# Altium PCB Uravu_1.PcbDoc
Units mil, origin at the board's own origin, x right, y up, seen from the top; angles counter-clockwise.
Board outline 3613.19 x 2814.96 mil, 2 copper layers (Top Layer, Bottom Layer); 12 components, 51 nets, 156 pads, 9 vias.
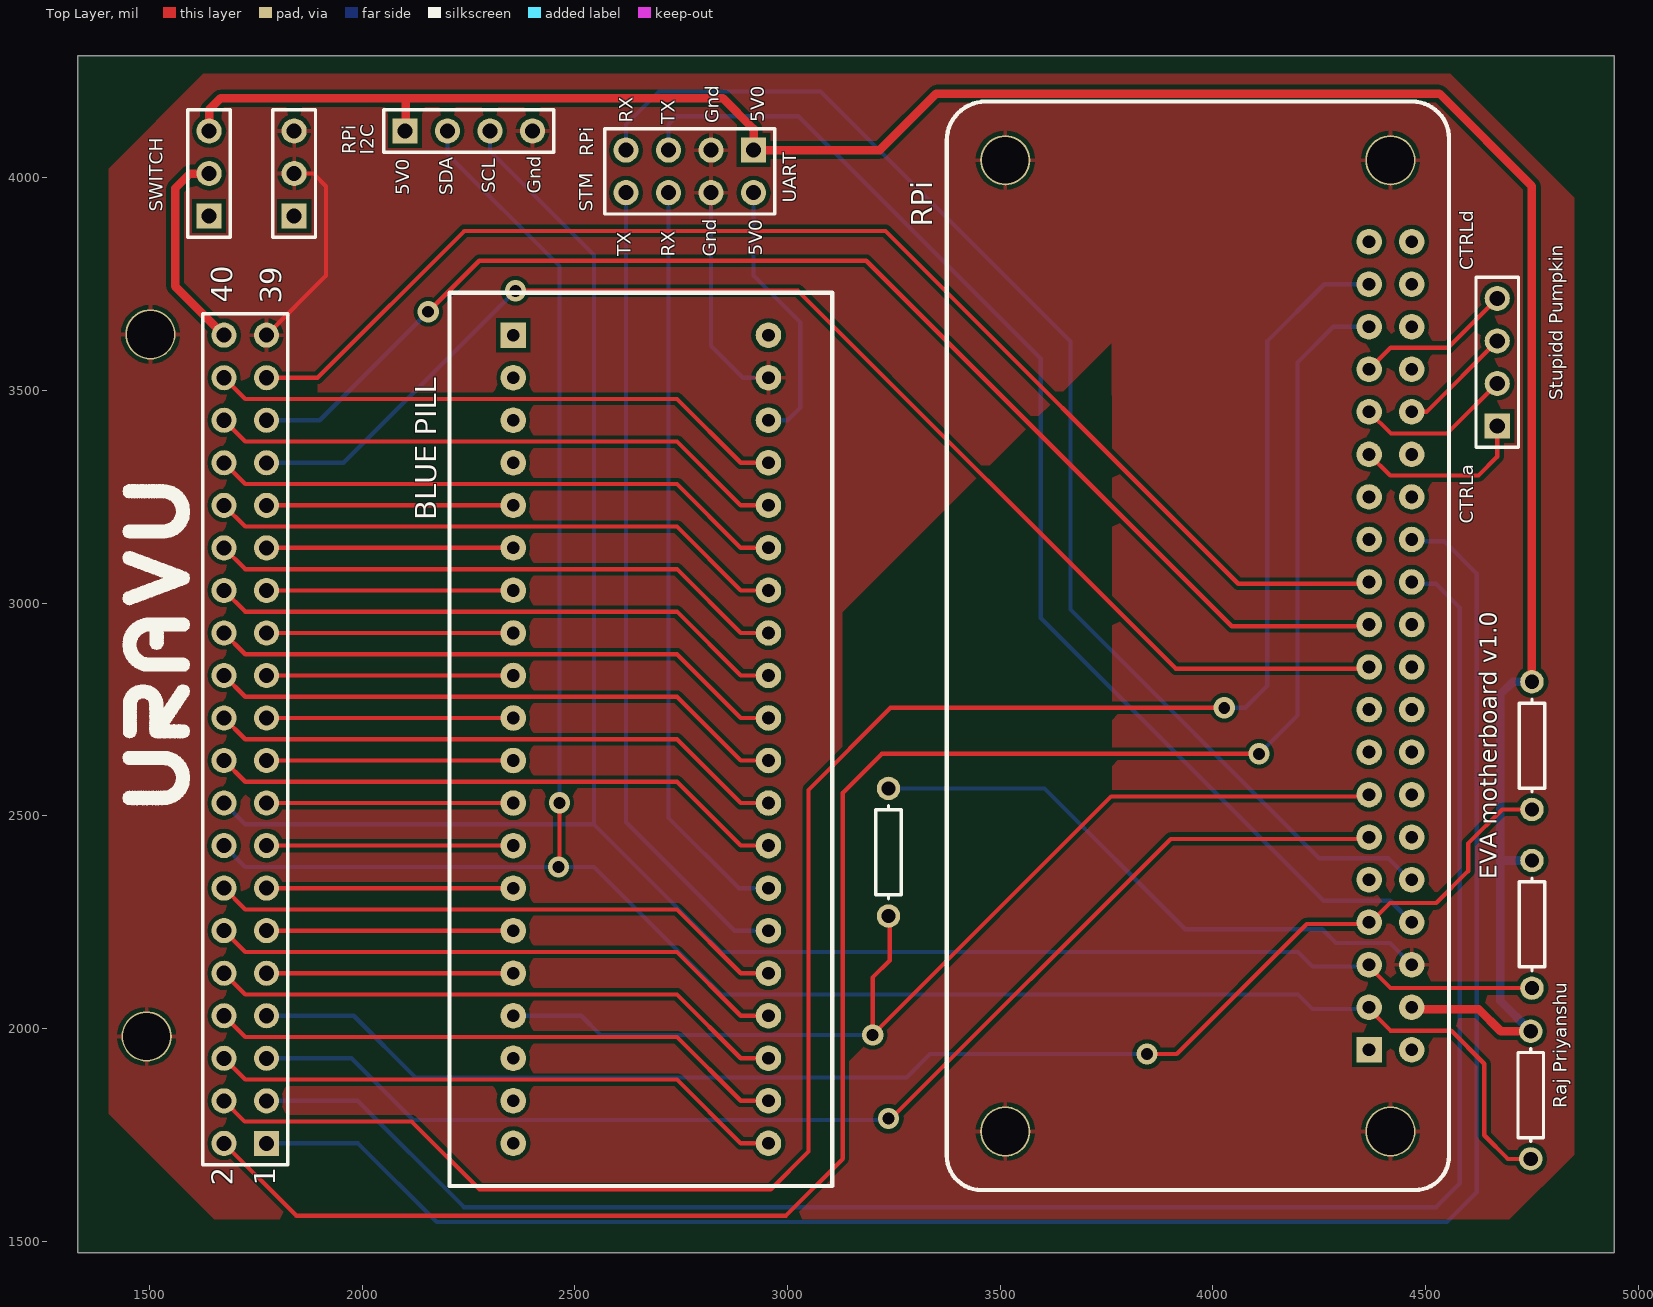
[diagram p0: Top Layer view]
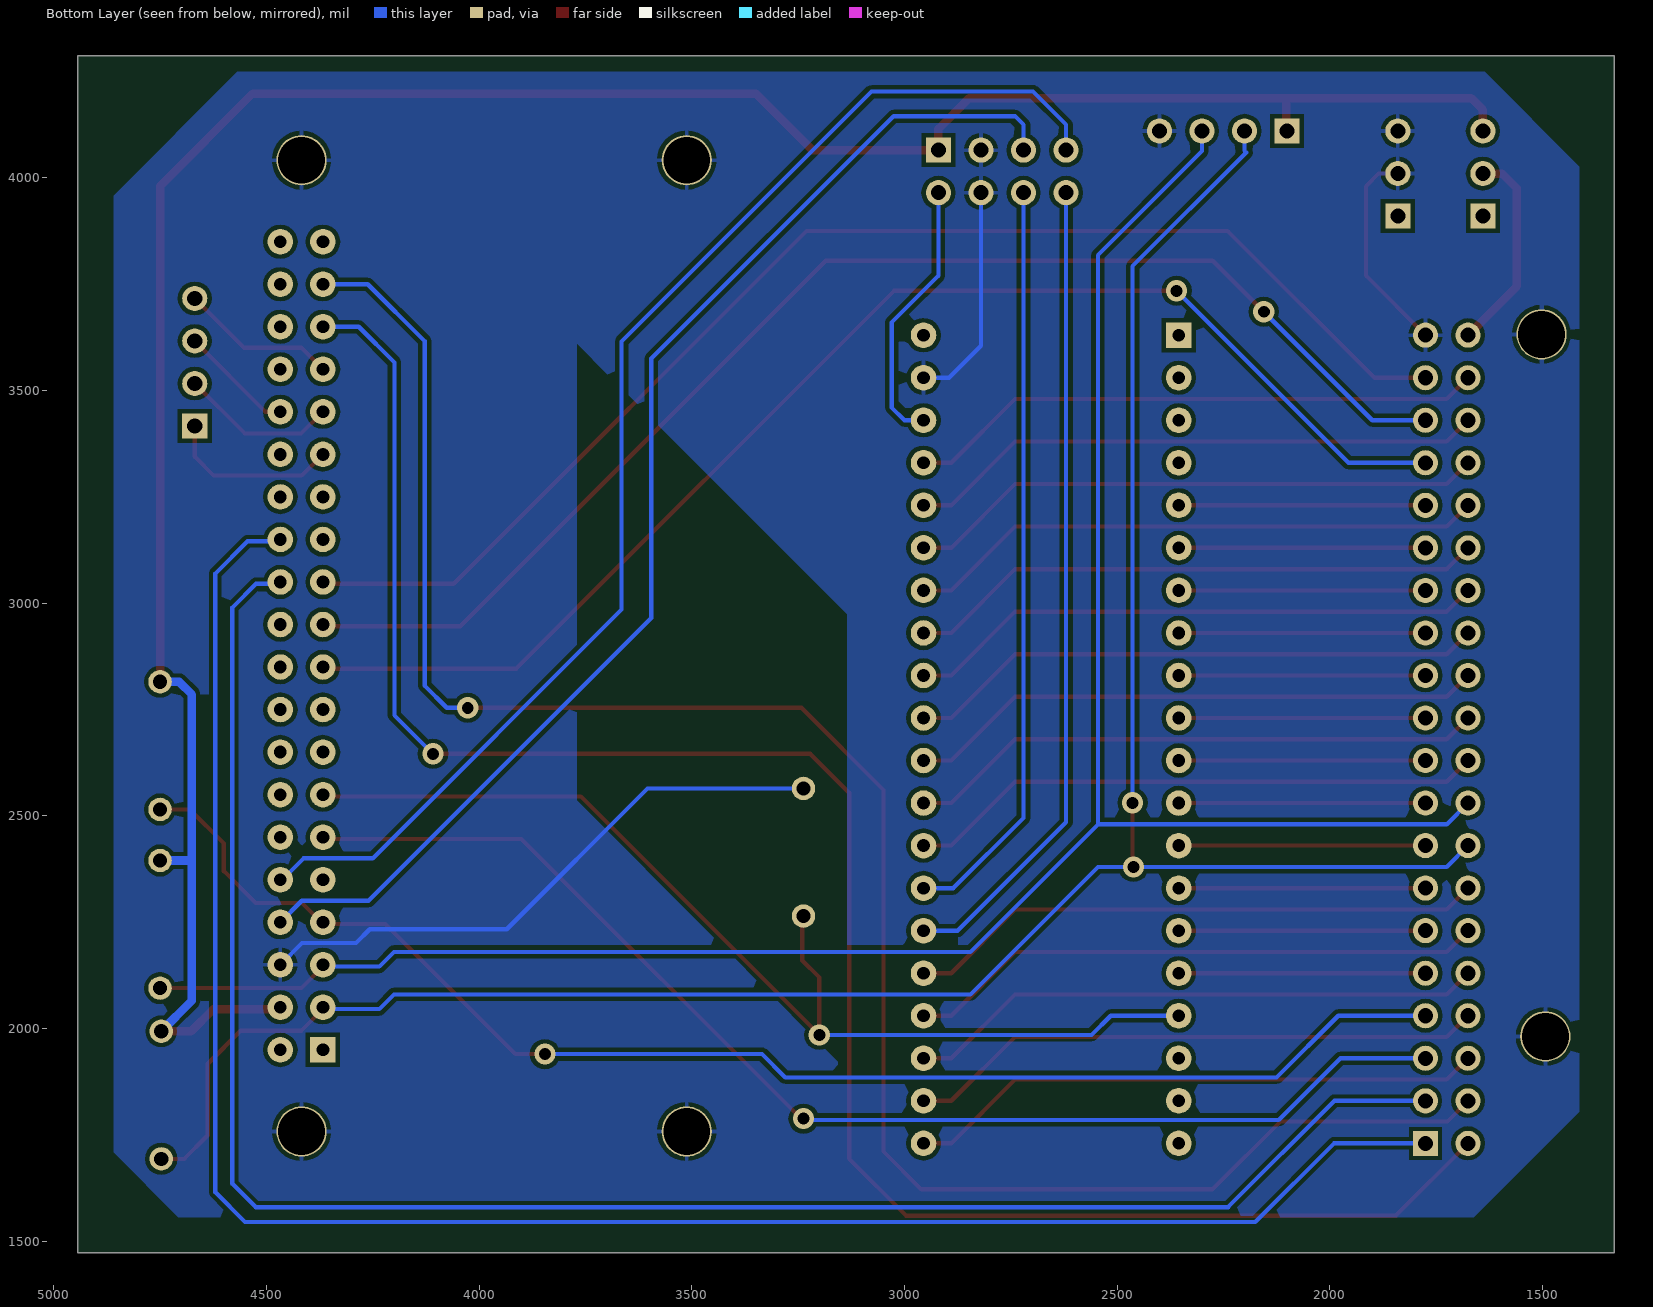
[diagram p1: Bottom Layer view, seen from below]

## Layer stack, top to bottom
Top Solder: solder mask 0.4, Solder Resist, Dk 3.5
Top Layer: signal copper 1.4
Dielectric 1: dielectric 12.6, FR-4, Dk 4.8
Bottom Layer: signal copper 1.4
Bottom Solder: solder mask 0.4, Solder Resist, Dk 3.5

## Board outline
1330.71,1472.44 4943.9,1472.44 4943.9,4287.4 1330.71,4287.4

## Design rules (kind name [scope] priority, off if disabled: settings)
Clearance [All] p1: gap=10
PolygonConnect [All] p1: connectstyle=Relief reliefconductorwidth=10 reliefentries=4 polygonreliefangle="90 Angle" airgapwidth=10
RoutingVias [All] p1: holewidth=28 width=50 viastyle="Through Hole" minholewidth=28 minwidth=50 maxholewidth=28 maxwidth=50
SolderMaskExpansion [All] p1: expansion=4
UnpouredPolygon [All] p1: allowunpoured=FALSE
Width [All] p1: maxlimit=39.37 minlimit=10 preferedwidth=10
29 further rules are at their usual default settings.

## Components (designator, comment, footprint, x,y, rotation, side; value= is the part's Value field where it differs from the comment)
P1 "Header 3" HDR1X3 1640,3910 r90 top
P2 "Header 3" HDR1X3 1840,3910 r90 top
P3 "Header 20X2" HDR2X20 1775,1730 r90 top
P4 "Header 4" HDR1X4 4668.31,3416.34 r90 top
P4 "Header 4" HDR1X4 2100.39,4110.24 r0 top
P5 "Header 4X2" HDR2X4 2920,4065 r180 top
R1 "Res1" AXIAL-0.3 4750,2665 r90 top
R2 "Res1" AXIAL-0.3 4750,2245 r90 top
R3 "Res1" AXIAL-0.3 4747.05,1843.5 r90 top
R4 "Res1" AXIAL-0.3 3237.2,2414.37 r270 top
U1 "STM32" BluePill 2205,3730 r0 top
U2 "RPi" "Raspberry Pi 0 w" 4555.12,4179.13 r180 top

## Footprints (in the part's own frame and the unit in brackets; to place one, negate y for a bottom-side part, rotate by r counter-clockwise, add the part's x,y. Pads: shape width x height; smd on the part's side, far side on the other; paste and mask are expansions set on the pad)
AXIAL-0.3 [mm] "Axial Device, Thru-Hole; 2 Leads; 0.3 in Pin Spacing"
  round 1.4 hole 0.85: 1(-3.81,0) 2(3.81,0)
  silkscreen extent -2.77,-0.76 2.77,0.76
BluePill [mil] "STM32"
  rect 60x60 hole 30: 1(150,-100)
  round 60 hole 30: 2(150,-200) 3(150,-300) 4(150,-400) 5(150,-500) 6(150,-600) 7(150,-700) 8(150,-800) 9(150,-900) 10(150,-1000) 11(150,-1100) 12(150,-1200) 13(150,-1300) 14(150,-1400) 15(150,-1500) 16(150,-1600) 17(150,-1700) 18(150,-1800) 19(150,-1900) 20(150,-2000) 21(750,-2000) 22(750,-1900) 23(750,-1800) 24(750,-1700) 25(750,-1600) 26(750,-1500) 27(750,-1400) 28(750,-1300) 29(750,-1200) 30(750,-1100) 31(750,-1000) 32(750,-900) 33(750,-800) 34(750,-700) 35(750,-600) 36(750,-500) 37(750,-400) 38(750,-300) 39(750,-200) 40(750,-100)
  silkscreen extent 0,-2100 900,0
HDR1X3 [mm] "Connector; Header; 3 Position"
  rect 1.5x1.5 hole 0.9: 1(0,0)
  round 1.5 hole 0.9: 2(2.54,0) 3(5.08,0)
  silkscreen extent -1.27,-1.27 6.35,1.27
HDR1X4 [mm] "Connector; Header; 4 Position"
  rect 1.5x1.5 hole 0.9: 1(0,0)
  round 1.5 hole 0.9: 2(2.54,0) 3(5.08,0) 4(7.62,0)
  silkscreen extent -1.27,-1.27 8.89,1.27
HDR2X4 [mm] "Connector; Header; 4x2 Position"
  rect 1.5x1.5 hole 0.9: 1(0,0)
  round 1.5 hole 0.9: 2(0,2.54) 3(2.54,0) 4(2.54,2.54) 5(5.08,0) 6(5.08,2.54) 7(7.62,0) 8(7.62,2.54)
  silkscreen extent -1.27,-1.27 8.89,3.81
HDR2X20 [mm] "Connector; Header; 20x2 Position"
  rect 1.5x1.5 hole 0.9: 1(0,0)
  round 1.5 hole 0.9: 2(0,2.54) 3(2.54,0) 4(2.54,2.54) 5(5.08,0) 6(5.08,2.54) 7(7.62,0) 8(7.62,2.54) 9(10.16,0) 10(10.16,2.54) 11(12.7,0) 12(12.7,2.54) 13(15.24,0) 14(15.24,2.54) 15(17.78,0) 16(17.78,2.54) 17(20.32,0) 18(20.32,2.54) 19(22.86,0) 20(22.86,2.54) 21(25.4,0) 22(25.4,2.54) 23(27.94,0) 24(27.94,2.54) 25(30.48,0) 26(30.48,2.54) 27(33.02,0) 28(33.02,2.54) 29(35.56,0) 30(35.56,2.54) 31(38.1,0) 32(38.1,2.54) 33(40.64,0) 34(40.64,2.54) 35(43.18,0) 36(43.18,2.54) 37(45.72,0) 38(45.72,2.54) 39(48.26,0) 40(48.26,2.54)
  silkscreen extent -1.27,-1.27 49.53,3.81
"Raspberry Pi 0 w" [mil] "RPi0w"
  rect 60x60 hole 30: 1(187.99,2229.33)
  round 60 hole 30: 2(87.99,2229.33) 3(187.99,2129.33) 4(87.99,2129.33) 5(187.99,2029.33) 6(87.99,2029.33) 7(187.99,1929.33) 8(87.99,1929.33) 9(187.99,1829.33) 10(87.99,1829.33) 11(187.99,1729.33) 12(87.99,1729.33) 13(187.99,1629.33) 14(87.99,1629.33) 15(187.99,1529.33) 16(87.99,1529.33) 17(187.99,1429.33) 18(87.99,1429.33) 19(187.99,1329.33) 20(87.99,1329.33) 21(187.99,1229.33) 22(87.99,1229.33) 23(187.99,1129.33) 24(87.99,1129.33) 25(187.99,1029.33) 26(87.99,1029.33) 27(187.99,929.33) 28(87.99,929.33) 29(187.99,829.33) 30(87.99,829.33) 31(187.99,729.33) 32(87.99,729.33) 33(187.99,629.33) 34(87.99,629.33) 35(187.99,529.33) 36(87.99,529.33) 37(187.99,429.33) 38(87.99,429.33) 39(187.99,329.33) 40(87.99,329.33)
  round 118.11 hole 110.24 mask+4: S1(137.8,137.8)
  round 118.11 hole 110.24: S2(1043.31,137.8) S3(1043.31,2421.26) S4(137.8,2421.26)
  silkscreen extent 0,0 1181,2559

## Part data
P1 P2: "Header, 3-Pin"
P3: "Header, 20-Pin, Dual row"
P4 P4: "Header, 4-Pin"
P5: "Header, 4-Pin, Dual row"
R1 R2 R3 R4: "Resistor"
U1: library part "Blue Pill", "Blue Pill: STM32f103c8"
U2: library part "Raspberry Pi 0 w", "Raspberry Pi 0 w GPIO"

## Free pads (board coordinates)
  round 118.11 hole 110.24: SHIELD(1493.11,1981.3) SHIELD(1501.97,3631.89)

## Via types
v1: diameter 50, hole 28, Top Layer to Bottom Layer, 9 vias

## Nets (pads, with @x,y where several pads share a name; then routed paths per layer and width w, separated by ;. In a path a pad name is that pad's centre, name@x,y a point inside that pad or via, vN(x,y) a via of type N, cw(c..) or ccw(c..) an arc to the next point about the centre after c; other vN are vias at no path point)
5V: P1.2 P3.40 | length 487.1
  Top Layer w20: P1.2 1595,4010 1560,3975 1560,3745 P3.40
5VA: P1.3 P4.1@2100.39,4110.24 P5.1 R1.2 R2.2 R3.2 U2.4 | length 5914.8
  Top Layer w20: P1.3 1640,4160 1667.01,4187.01 2102.36,4187.01 P4.1@2102.36,4118.11 ; 2103.35,4187.01 2847.99,4187.01 2920,4115 P5.1 3216.57,4065 3349.41,4197.83 4532.48,4197.83 4750,3980.32 R1.2 ; U2.4@4467.01,2045.67 4624.61,2045.67 4676.77,1993.5 R3.2
  Bottom Layer w20: R3.2 4675,2065.55 4675,2395 ; R2.2 4675,2395 ; R1.2 4705,2815 4675,2785 4675,2395
5VB: P5.2 U1.38 | length 638
  Bottom Layer w10: P5.2 2920,3770 3030,3660 3030,3460 3000,3430 U1.38
CE0N_RPI: P3.3 U2.24 | length 4422.4
  Bottom Layer w10: P3.3 1988.9,1830 2238.9,1580 4525,1580 4580,1635 4580,2990 4524.33,3045.67 U2.24@4467.01,3045.67
CE1N_RPI: P3.1 U2.26 | length 4590
  Bottom Layer w10: P3.1 1990,1730 2175,1545 4550,1545 4620,1615 4620,3070 4544.33,3145.67 U2.26@4467.01,3145.67
CTRL_1W: P3.7 R1.1 U2.7 | length 3368.2
  Top Layer w10: v1(3845,1940) 3915,1940 4220.67,2245.67 4367.01,2245.67 4416.34,2295 4525,2295 4600,2370 4600,2435 4680,2515 R1.1
  Bottom Layer w10: P3.7 1980,2030 2125,1885 3280,1885 3335,1940 3855,1940 3845,1950 v1(3845,1940)
CTRL_UPS: P3.5 U2.11 | length 2934.5
  Top Layer w10: v1(3237.2,1788.39) 3237.2,1782.2 3900.67,2445.67 U2.11@4367.01,2445.67
  Bottom Layer w10: P3.5 1975,1930 2120,1785 3233.82,1785 v1(3237.2,1788.39)
CTRLA: P4.1@4668.31,3416.34 U2.29 | length 411.9
  Top Layer w10: U2.29 4416.73,3300.2 4624.02,3300.2 4668.31,3344.49 P4.1@4668.31,3416.34
CTRLB: P4.2@4668.31,3516.34 U2.31 | length 371.1
  Top Layer w10: U2.31 4418.31,3398.62 4550.59,3398.62 P4.2@4668.31,3516.34
CTRLC: P4.3@4668.31,3616.34 U2.32 | length 270.2
  Top Layer w10: U2.32 4501.77,3449.8 P4.3@4668.31,3616.34
CTRLD: P4.4@4668.31,3716.34 U2.33 | length 370.2
  Top Layer w10: U2.33 4417.72,3600.39 4552.36,3600.39 P4.4@4668.31,3716.34
GND: P2.2 P2.3 P3.39 P4.4@2400.39,4110.24 P5.3 P5.4 pad.SHIELD R4.1 U1.39 U2.6 U2.S1 U2.S2 U2.S3 U2.S4 | length 2423.1
  Top Layer w10: P3.39 1915,3770 1915,3980 1885,4010 P2.2
  Bottom Layer w10: P5.4 2820,3605 2895,3530 U1.39 ; R4.1 3603.94,2564.37 3935.04,2233.27 4256.89,2233.27 4289.37,2200.79 4416.14,2200.79 U2.6
MISO_RPI: P3.35 U2.21 | length 3103.4
  Top Layer w10: v1(2155,3685) 2275.12,3805.12 3184.88,3805.12 4044.33,2945.67 U2.21@4367.01,2945.67
  Bottom Layer w10: P3.35 1900,3430 v1(2155,3685)
MOSI_RPI: P3.33 U2.19 | length 3165
  Top Layer w10: v1(2360.24,3734.25) 3024.25,3734.25 3912.83,2845.67 U2.19@4367.01,2845.67
  Bottom Layer w10: P3.33 1955.98,3330 2367.99,3742.01 2360.24,3749.76 v1(2360.24,3734.25)
NRST2: P3.4 U2.37 | length 4632.3
  Top Layer w10: P3.4 1723.5,1781.5 2116.14,1781.5 2275.59,1622.05 2960.63,1622.05 3049.21,1710.63 3049.21,2561.02 3242.13,2753.94 v1(4026.57,2753.94)
  Bottom Layer w10: v1(4026.57,2753.94) 4075.79,2753.94 4127.95,2806.1 4127.95,3616.14 4261.61,3749.8 U2.37
NRST_STM: R4.2 U1.17 U2.13 | length 2554.5
  Top Layer w10: R4.2@3240,2260 3240,2160 3200,2120 v1(3200,1985) 3760.67,2545.67 U2.13@4367.01,2545.67
  Bottom Layer w10: U1.17 2515,2030 2560,1985 v1(3200,1985)
PA0: P3.31 U1.5 | length 580
  Top Layer w10: P3.31 U1.5
PA1: P3.29 U1.6 | length 580
  Top Layer w10: P3.29 U1.6
PA2: P3.27 U1.7 | length 580
  Top Layer w10: P3.27 U1.7
PA3: P3.25 U1.8 | length 580
  Top Layer w10: P3.25 U1.8
PA4: P3.23 U1.9 | length 580
  Top Layer w10: P3.23 U1.9
PA5: P3.21 U1.10 | length 580
  Top Layer w10: P3.21 U1.10
PA6: P3.19 U1.11 | length 580
  Top Layer w10: P3.19 U1.11
PA7: P3.17 U1.12 | length 580
  Top Layer w10: P3.17 U1.12
PA8: P3.14 U1.25 | length 1362.8
  Top Layer w10: P3.14 1725,2280 2740,2280 2890,2130 U1.25
PA11: P3.20 U1.28 | length 1362.8
  Top Layer w10: P3.20 1725,2580 2740,2580 2890,2430 U1.28
PA12: P3.22 U1.29 | length 1362.8
  Top Layer w10: P3.22 1725,2680 2740,2680 2890,2530 U1.29
PA15: P3.24 U1.30 | length 1362.8
  Top Layer w10: P3.24 1725,2780 2740,2780 2890,2630 U1.30
PB0: P3.15 U1.13 | length 580
  Top Layer w10: P3.15 U1.13
PB1: P3.13 U1.14 | length 580
  Top Layer w10: P3.13 U1.14
PB3: P3.26 U1.31 | length 1362.8
  Top Layer w10: P3.26 1725,2880 2740,2880 2890,2730 U1.31
PB4: P3.28 U1.32 | length 1362.8
  Top Layer w10: P3.28 1725,2980 2740,2980 2890,2830 U1.32
PB5: P3.30 U1.33 | length 1362.8
  Top Layer w10: P3.30 1725,3080 2740,3080 2890,2930 U1.33
PB6: P3.32 U1.34 | length 1362.8
  Top Layer w10: P3.32 1725,3180 2740,3180 2890,3030 U1.34
PB7: P3.34 U1.35 | length 1362.8
  Top Layer w10: P3.34 1725,3280 2740,3280 2890,3130 U1.35
PB8: P3.36 U1.36 | length 1362.8
  Top Layer w10: P3.36 1725,3380 2740,3380 2890,3230 U1.36
PB9: P3.38 U1.37 | length 1362.8
  Top Layer w10: P3.38 1725,3480 2740,3480 2890,3330 U1.37
PB10: P3.11 U1.15 | length 580
  Top Layer w10: P3.11 U1.15
PB11: P3.9 U1.16 | length 580
  Top Layer w10: P3.9 U1.16
PB12: P3.6 U1.21 | length 1362.8
  Top Layer w10: P3.6 1725,1880 2740,1880 2890,1730 U1.21
PB13: P3.8 U1.22 | length 1362.8
  Top Layer w10: P3.8 1725,1980 2740,1980 2890,1830 U1.22
PB14: P3.10 U1.23 | length 1362.8
  Top Layer w10: P3.10 1725,2080 2740,2080 2890,1930 U1.23
PB15: P3.12 U1.24 | length 1362.8
  Top Layer w10: P3.12 1725,2180 2740,2180 2890,2030 U1.24
RX_RPI: P5.7 U2.10 | length 3077.5
  Bottom Layer w10: P5.7 2620,4125 2697.76,4202.76 3077.24,4202.76 3665,3615 3665,2985 4250,2400 4412.68,2400 U2.10@4467.01,2345.67
RX_STM: P5.6 U1.27 | length 1773.3
  Bottom Layer w10: P5.6 2720,2495 2885,2330 U1.27
SCL_RPI: P3.18 P4.3@2300.39,4110.24 R2.1 U2.5 | length 4986.7
  Top Layer w10: U2.5@4367.01,2145.67 4417.68,2095 R2.1
  Bottom Layer w10: P3.18 1725,2480 2545,2480 ; P4.3@2300.39,4110.24 2300.39,4062.8 2545,3818.19 2545,2480 ; U2.5@4367.01,2145.67 4234.33,2145.67 4200,2180 2845,2180 2545,2480
SCLK_RPI: P3.37 U2.23 | length 3078.4
  Top Layer w10: P3.37 1895,3530 2240,3875 3230,3875 4059.33,3045.67 U2.23@4367.01,3045.67
SDA_RPI: P3.16 P4.2@2200.39,4110.24 R3.1 U2.3 | length 5322.4
  Top Layer w10: v1(2461.61,2379.92) 2457.68,2383.86 2463.58,2389.76 v1(2463.58,2530.51) ; U2.3@4367.01,2045.67 4417.68,1995 4560.12,1995 4637.8,1917.32 4637.8,1749.02 4693.31,1693.5 R3.1
  Bottom Layer w10: P3.16 1725,2380 2545,2380 2845,2080 4200,2080 4234.33,2045.67 U2.3@4367.01,2045.67 ; P4.2@2200.39,4110.24 2200.39,4063.39 2196.46,4059.45 2463.58,3792.32 v1(2463.58,2530.51)
SENSE_UPS: P3.2 U2.35 | length 4618.1
  Top Layer w10: P3.2 1844.96,1560.04 2996.06,1560.04 3129.92,1693.9 3129.92,2554.13 3221.46,2645.67 v1(4108.27,2645.67)
  Bottom Layer w10: v1(4108.27,2645.67) 4198.82,2736.22 4198.82,3565.94 4282.68,3649.8 U2.35
TX_RPI: P5.5 U2.8 | length 2957.8
  Bottom Layer w10: P5.5 2720,4125 2740,4145 3025,4145 3595,3575 3595,2965 4259.8,2300.2 4416.73,2300.2 U2.8
TX_STM: P5.8 U1.26 | length 1920.6
  Bottom Layer w10: P5.8 2620,2485 2875,2230 U1.26
pads on no net: P1.1 P2.1 U1.1 U1.2 U1.3 U1.4 U1.18 U1.19 U1.20 U1.40 U2.1 U2.2 U2.9 U2.12 U2.14 U2.15 U2.16 U2.17 U2.18 U2.20 U2.22 U2.25 U2.27 U2.28 U2.30 U2.34 U2.36 U2.38 U2.39 U2.40

## Polygon pours and split planes (outlines as drawn)
GND on Bottom Layer "GND2" (solid, remove dead copper, pour order 4): 4859.25,1708.66 4859.25,3957.68 4567.91,4249.02 1635.83,4249.02 1413.39,4026.57 1413.39,1804.13 1661.42,1556.1 4706.69,1556.1
GND on Top Layer "Gnd" (solid, remove dead copper, pour order 3): 4849.41,1703.74 4849.41,3952.76 4558.07,4244.09 1625.98,4244.09 1403.54,4021.65 1403.54,1799.21 1651.57,1551.18 4696.85,1551.18

## Other copper
Top Layer:
  pour cut-out: 3762.63,3612.15 3762.81,2540.39 3128.94,1906.41 3128.94,2978.34
Bottom Layer:
  pour cut-out: 3769.51,3608.17 3769.68,2536.42 3135.81,1902.44 3135.81,2974.37

## Silkscreen, mask and mechanical layers (free items; w line width, h text height)
Top Overlay:
  drawing of 1401 lines, arcs and shapes, not listed
  text "5V0" at 2944.88,4130.91 h32 r90
  text "RX" at 2635.83,4128.94 h32 r90
  text "Gnd" at 2837.6,4127.95 h32 r90
  text "TX" at 2735.24,4125.98 h32 r90
  text "RPi" at 1985.24,4055.12 h32 r90
  text "I2C" at 2027.56,4054.13 h32 r90
  text "RPi" at 2543.31,4051.18 h32 r90
  text "SCL" at 2312.99,3963.58 h32 r90
  text "Gnd" at 2419.29,3962.6 h32 r90
  text "5V0" at 2110.24,3958.66 h32 r90
  text "SDA" at 2212.6,3958.66 h32 r90
  text "UART" at 3020.67,3941.93 h32 r90
  text "SWITCH" at 1531.5,3920.28 h32 r90
  text "STM" at 2541.34,3920.28 h32 r90
  text "RPi" at 3339.57,3884.84 h50 r90
  text "5V0" at 2939.96,3816.93 h32 r90
  text "TX" at 2630.91,3815.94 h32 r90
  text "RX" at 2735.24,3813.98 h32 r90
  text "Gnd" at 2832.68,3813.98 h32 r90
  text "CTRLd" at 4612.2,3782.48 h32 r90
  text "Stupidd Pumpkin" at 4821.85,3477.36 h32 r90
  text "BLUE PILL" at 2174.21,3194.88 h50 r90
  text "CTRLa" at 4612.2,3187.01 h32 r90
  text "EVA motherboard v1.0" at 4667.32,2351.38 h40 r90
  text "Raj Priyanshu" at 4831.69,1812.01 h32 r90
Mechanical 1:
  lines w10: 1381.89,1781.5 ccw(c1656.5,1781.5) 1656.5,1506.89 4676.18,1506.89 ccw(c4676.18,1701.77) 4871.06,1701.77 4871.06,3985.24 ccw(c4596.46,3985.24) 4596.46,4259.84 1590.55,4259.84 ccw(c1590.55,4051.18) 1381.89,4051.18 1381.89,1781.5

## Dimensions
1397.64,1510.83 to 1383.86,4261.81 on Top Overlay
1393.7,1461.61 to 4880.91,1470.47 on Top Overlay

## Text inside footprints (layer, text, board x,y; h text height)
P3: Top Overlay "1" at 1795,1630 h50 r90; Top Overlay "2" at 1695,1630 h50 r90; Top Overlay "40" at 1694.88,3706.69 h50 r90; Top Overlay "39" at 1809.06,3703.74 h50 r90